# Altium PCB pcb.PcbDoc
Units mil, origin at the board's own origin, x right, y up, seen from the top; angles counter-clockwise.
Board outline 2225 x 1875 mil, 2 copper layers (Top Layer, Bottom Layer), stack 60.4 mil thick; 8 components, 10 nets, 39 pads, 4 vias.
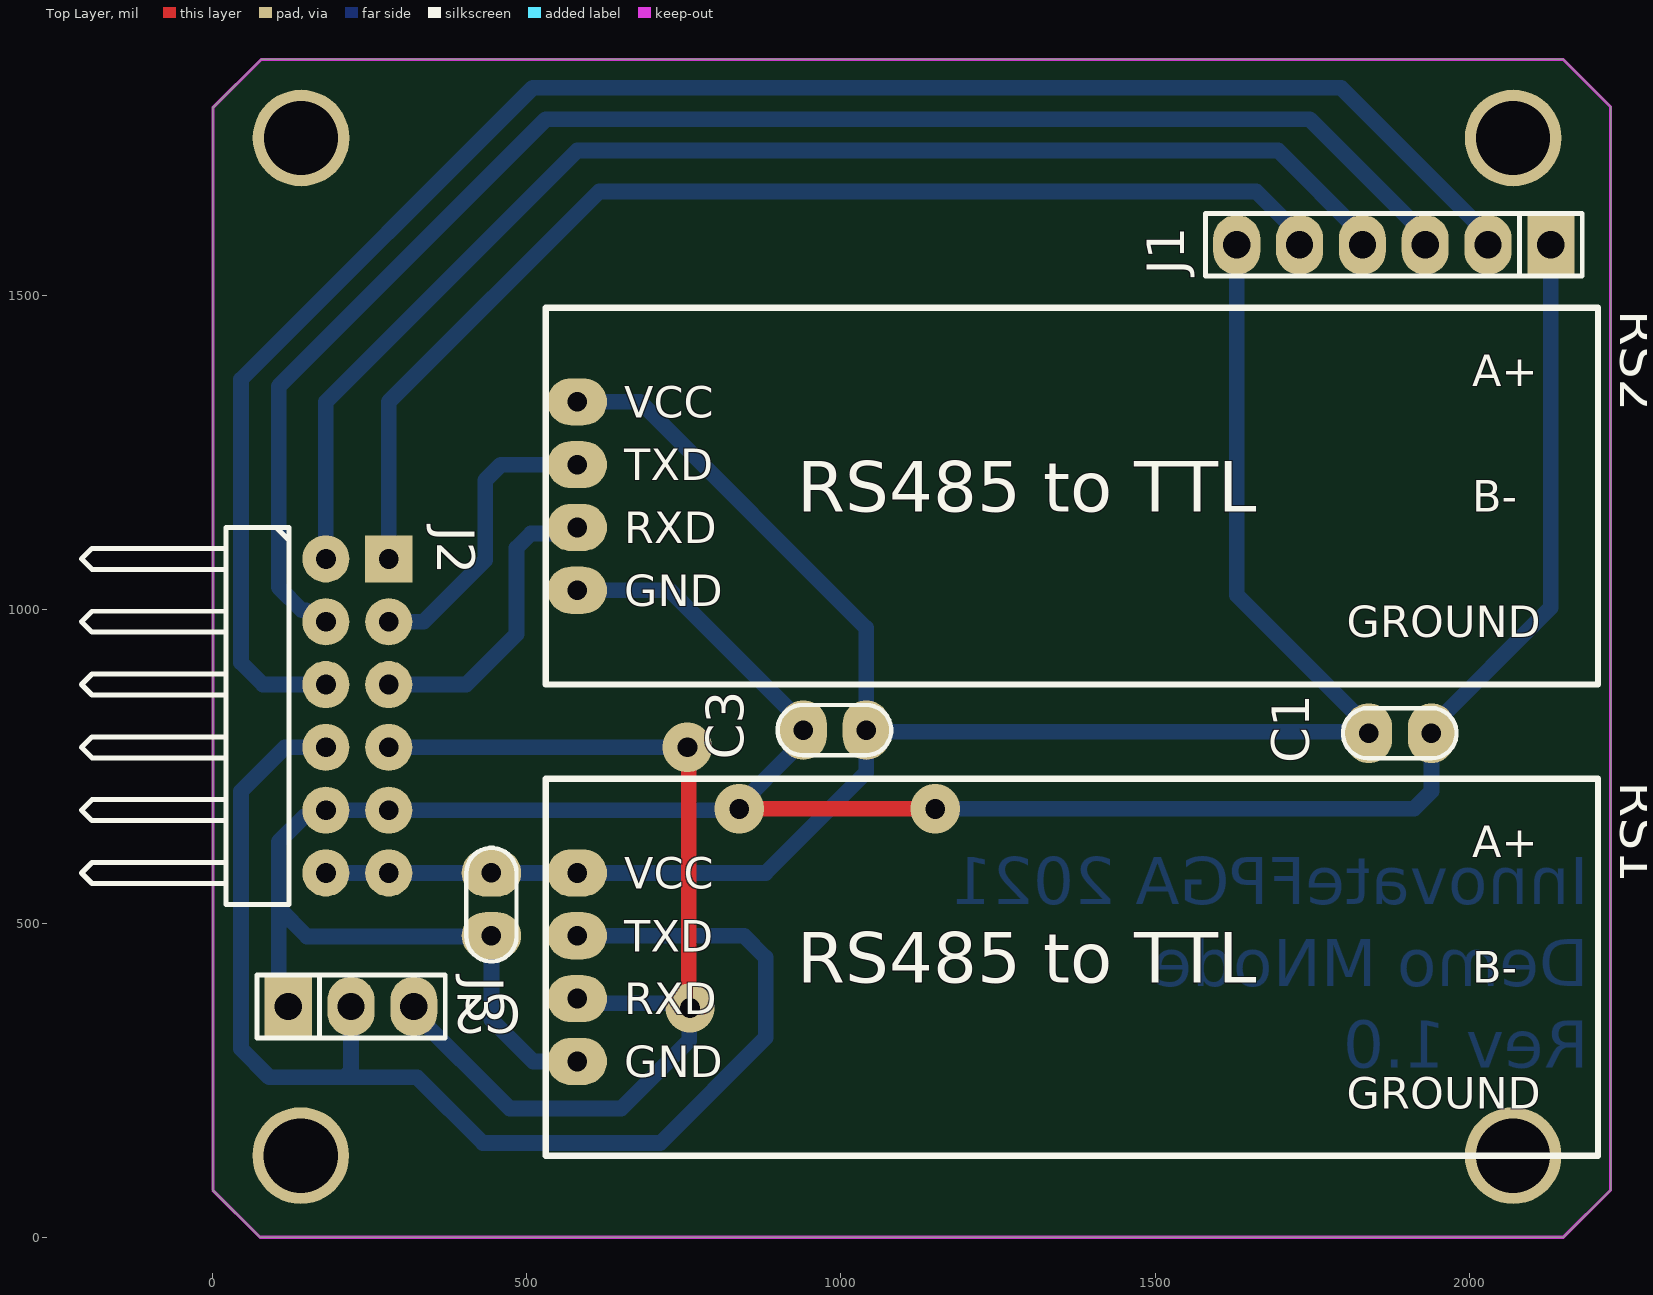
[diagram p0: Top Layer view]
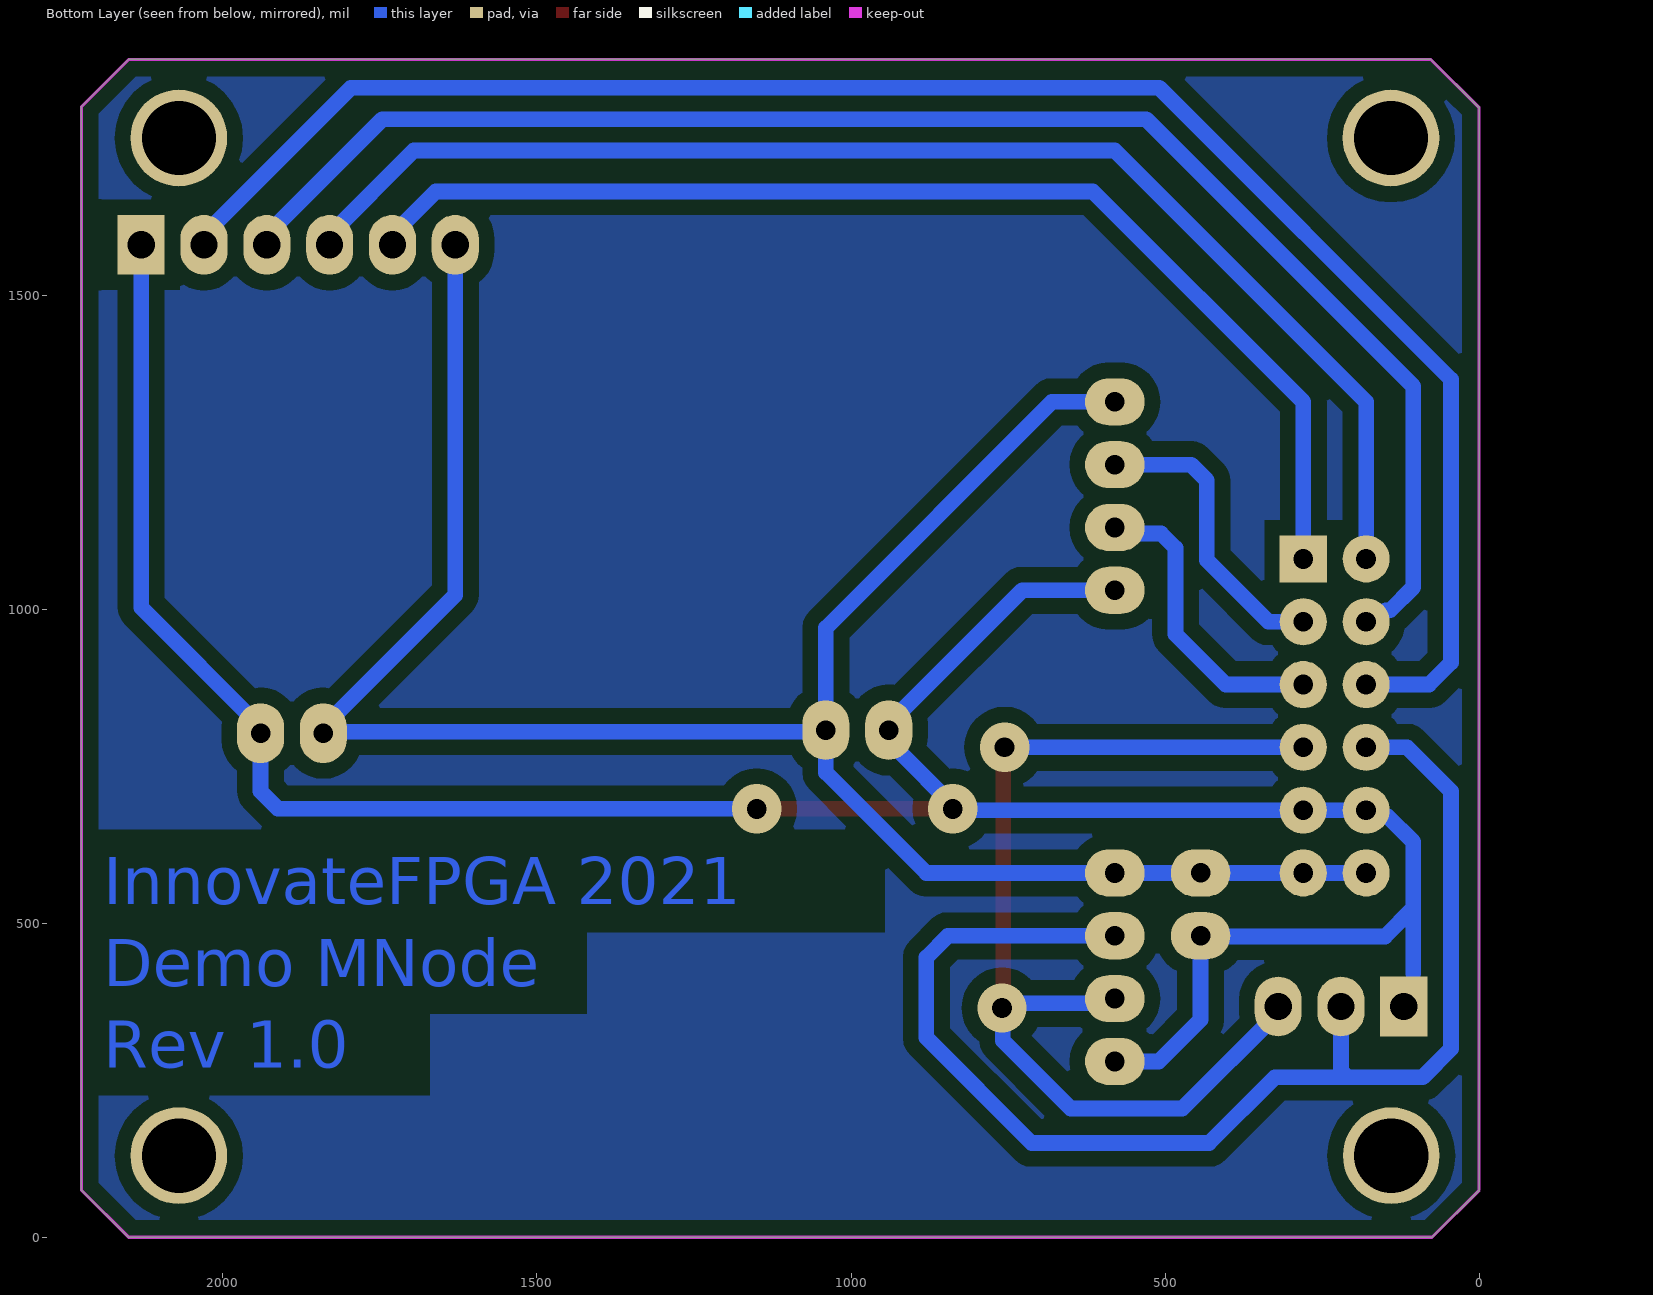
[diagram p1: Bottom Layer view, seen from below]
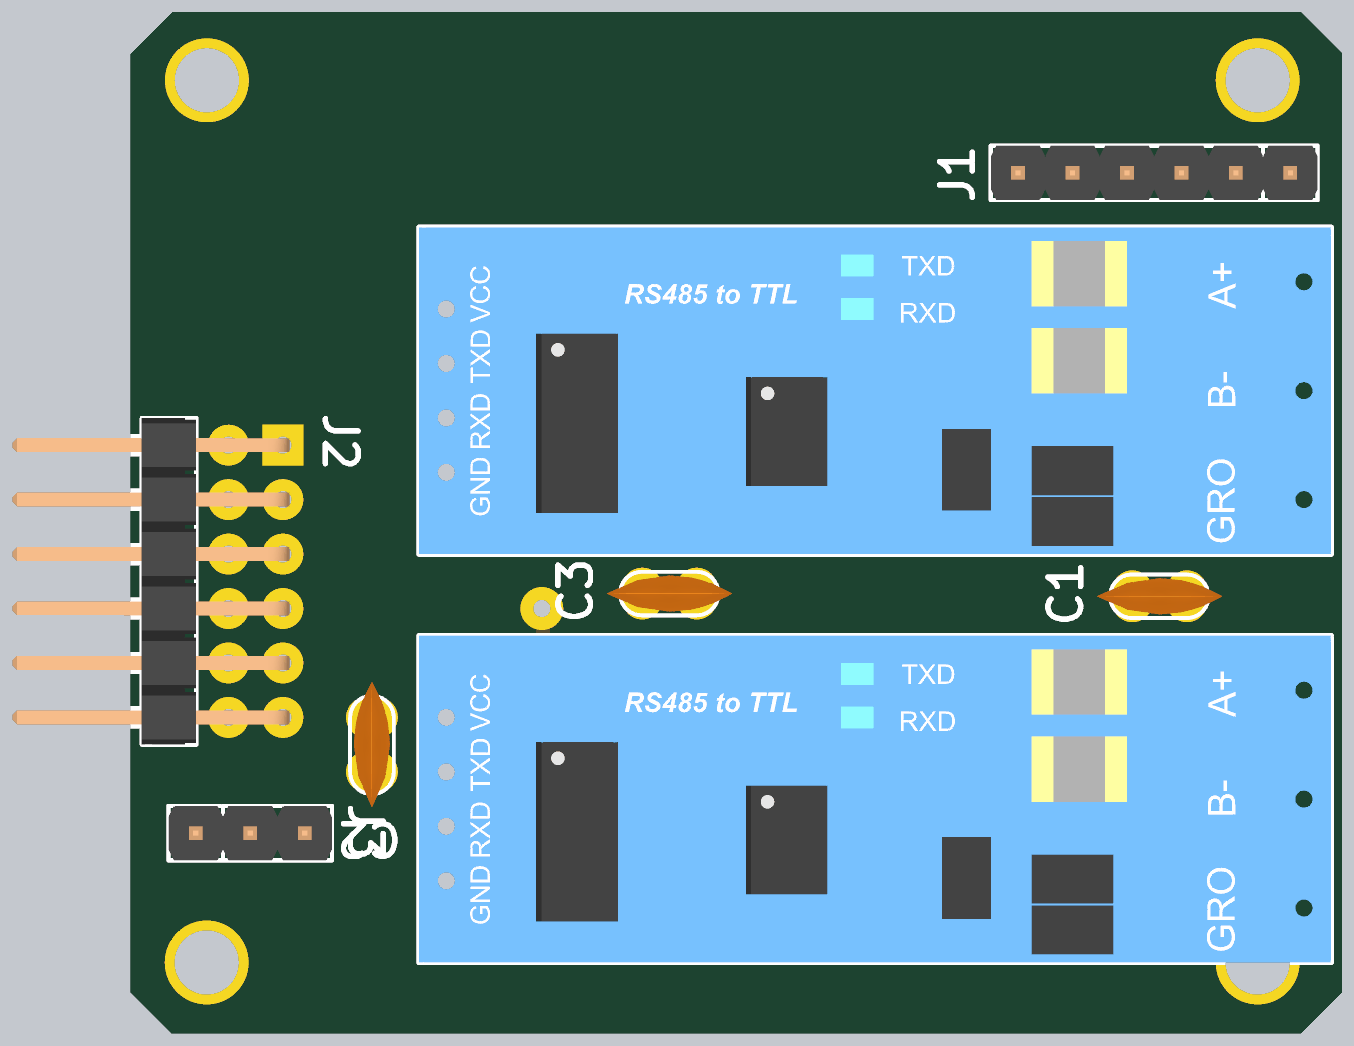
[diagram p2: 3D render of the assembled board from above, using the file's embedded part models]

## Layer stack, top to bottom
Top Solder: solder mask 0.5, Solder Resist, Dk 3.3
Top Layer: signal copper 0.7
Dielectric1: core 59, FR-4, Dk 4.3
Bottom Layer: signal copper 0.7
Bottom Solder: solder mask 0.5, Solder Resist, Dk 3.3

## Board outline
0,75.07 75.07,0 2150,0 2225,75 2225,1800 2150,1875 76.85,1875 0,1798.15

## Design rules (kind name [scope] priority, off if disabled: settings)
Clearance Clearance_2 [InNamedPolygon('NONET_L02_P000')] p1: gap=25 ignorepadtopadclearanceinfootprint=FALSE
Clearance Clearance_1 [InNamedPolygon('NONET_L01_P000')] p2: gap=25 ignorepadtopadclearanceinfootprint=FALSE
Clearance [All] p3: gap=0 ignorepadtopadclearanceinfootprint=FALSE
DiffPairsRouting [All] p1: maxlimit=10 minlimit=10 mostfreqgap=10 toplayer_minwidth=10 toplayer_maxwidth=10 toplayer_prefwidth=10 bottomlayer_minwidth=10 bottomlayer_maxwidth=10 bottomlayer_prefwidth=10 maxuncoupledlength=500
HoleSize [All] p1: absolutevalues=TRUE maxlimit=300 minlimit=10 maxpercent=80.000 minpercent=20.000
MinimumAnnularRing [All] p1: minimumring=10
MinimumSolderMaskSliver [All] p1: minsoldermaskwidth=0
PasteMaskExpansion [All] p1: expansion=10
PlaneClearance [All] p1: clearance=0
PlaneConnect [All] p1: pad.planeconnectstyle=Relief pad.reliefexpansion=20 pad.reliefentries=4 pad.reliefconductorwidth=10 pad.reliefairgap=10 via.planeconnectstyle=Direct via.reliefexpansion=20 via.reliefentries=4 via.reliefconductorwidth=10 via.reliefairgap=10
PolygonConnect [All] p1: thpad.connectstyle=Relief thpad.reliefconductorwidth=10 thpad.reliefentries=4 thpad.polygonreliefangle="90 Angle" thpad.airgapwidth=10 smdpad.connectstyle=Relief smdpad.reliefconductorwidth=10 smdpad.reliefentries=4 smdpad.polygonreliefangle="90 Angle" smdpad.airgapwidth=10 via.connectstyle=Direct via.reliefconductorwidth=10 via.reliefentries=4 via.polygonreliefangle="90 Angle" via.airgapwidth=10
RoutingVias [All] p1: holewidth=39.37 width=39.37 viastyle="Through Hole" minholewidth=10 minwidth=20 maxholewidth=100 maxwidth=100
SMDNeckDown [All] p1: percent=100.000
SilkToSilkClearance [All] p1: silktosilkclearance=0
SilkToSolderMaskClearance SilkscreenOverComponentPads [IsPad] p1: minsilkscreentomaskgap=0 clearancetoexposedcopper=TRUE
SolderMaskExpansion [All] p1: expansion=0 istentingtop=FALSE
Width [All] p1: maxlimit=40 minlimit=10 preferedwidth=25
22 further rules are at their usual default settings.

## Components (designator, comment, footprint, x,y, rotation, side; value= is the part's Value field where it differs from the comment)
C1 "104" CAP-CERAMIC-100mil-BPAD 1890,802.48 r180 top
C2 "104" CAP-CERAMIC-100mil-BPAD 443.49,530 r270 top
C3 "104" CAP-CERAMIC-100mil-BPAD 990,807.45 r180 top
J1 "Header 6x1" TER-J6x1-M-2.54mm-BPAD 2130,1580 r180 top
J2 "TMD Header" TER-J6x2-M-2.54mm-V-BPAD 230,830 r270 top
J3 "Header 3x1" TER-J3x1-M-2.54mm-BPAD 120,367.52 r0 top
RS1 "RS485-Module" COMM-RS485-to-TTL-MODULE-SIMPLIFIED-BPAD 580,580 r0 top
RS2 "RS485-Module" COMM-RS485-to-TTL-MODULE-SIMPLIFIED-BPAD 580,1330 r0 top

## Footprints (in the part's own frame and the unit in brackets; to place one, negate y for a bottom-side part, rotate by r counter-clockwise, add the part's x,y. Pads: shape width x height; smd on the part's side, far side on the other; paste and mask are expansions set on the pad)
CAP-CERAMIC-100mil-BPAD [mil] "CN1"
  oval 75x95 hole 31: 1(-50,0) 2(50,0)
  silkscreen extent -90,-40 91,40, body extent -115,-33 115,33, height 265
COMM-RS485-to-TTL-MODULE-SIMPLIFIED-BPAD [mil] "5#RS485 to TTL module"
  oval 95x75 hole 31.5: 1(0,0) 2(0,-100) 3(0,-200) 4(0,-300)
  silkscreen extent -50,-450 1625,150, body extent -50,-450 1625,150, height 195
TER-J3x1-M-2.54mm-BPAD [mil] "3 pins, 1 row, straight, gold plating, JP3-D1T"
  rect 75x95 hole 43.31: 1(0,0)
  oval 75x95 hole 43.31: 2(100,0) 3(200,0)
  silkscreen extent -50,-50 250,50, body extent -50,-50 250,50, height 336
TER-J6x1-M-2.54mm-BPAD [mil] "6 pins, 1 row, straight, gold plating, JP6-D1T"
  rect 75x95 hole 43.31: 1(0,0)
  oval 75x95 hole 43.31: 2(100,0) 3(200,0) 4(300,0) 5(400,0) 6(500,0)
  silkscreen extent -50,-50 550,50, body extent -50,-50 550,50, height 336
TER-J6x2-M-2.54mm-V-BPAD [mm] "12 pins, dual row, right angled, gold plating, JP6-D2C"
  rect 1.905x1.905 hole 0.8: 1(-6.35,1.27)
  round 1.905 hole 0.8: 2(-3.81,1.27) 3(-1.27,1.27) 4(1.27,1.27) 5(3.81,1.27) 6(6.35,1.27) 7(-6.35,-1.27) 8(-3.81,-1.27) 9(-1.27,-1.27) 10(1.27,-1.27) 11(3.81,-1.27) 12(6.35,-1.27)
  silkscreen extent -7.62,-11.15 7.62,-2.77, body extent -7.62,-11.33 7.62,1.57, height 5.09

## Part data
C1 C2 C3: library part CAP, "Capacitor"
J2: library part "Header 6x2"
RS1 RS2: library part "COMM RS485-to-TTL-simplified", "https://www.thegioiic.com/products/mach-chuyen-doi-rs485-to-ttl"

## Free pads (board coordinates)
  round 154 hole 118.11: 0(140,130) 0(140.43,1750) 0(2070,130) 0(2070,1750)

## Via types
v1: diameter 78.74, hole 31.5, Top Layer to Bottom Layer, 4 vias

## Nets (pads, with @x,y where several pads share a name; then routed paths per layer and width w, separated by ;. In a path a pad name is that pad's centre, name@x,y a point inside that pad or via, vN(x,y) a via of type N, cw(c..) or ccw(c..) an arc to the next point about the centre after c; other vN are vias at no path point)
+3.3: C1.2 C2.1 C3.1 J1.6 J2.6 J2.12 RS1.1 RS2.1 | length 3431.9
  Bottom Layer w25: J2.12 J2.6 C2.1 RS1.1 880,580 1040,740 C3.1 ; RS2.1 680,1330 1040,970 C3.1 ; J1.6 1630,1022.48 1840,812.48 C1.2 1837.52,804.97 1042.48,804.97 C3.1
GND: C1.1 C2.2 C3.2 J1.1 J2.5 J2.11 J3.1 RS1.4 RS2.4 | length 4274.3
  Top Layer w25: v1(837.94,682.06) v1(1150,682.06)
  Bottom Layer w25: 105,419.37 105,524 ; RS1.4 510,280 443.49,346.51 C2.2 442.49,479 150,479 105,524 ; RS2.4 727.45,1030 940,817.45 C3.2 ; C3.2@930.9,780.9 830,680 J2.5 J2.11 170.43,670.43 145.87,670.43 105,629.57 105,524 ; v1(1150,682.06) 1912.06,682.06 1940,710 C1.1 1940,812.48 2130,1002.48 J1.1
TMD_D0: J1.5 J2.1 | length 1883.4
  Bottom Layer w25: J2.1 280,1330 615,1665 1661.07,1665 1730,1596.07 J1.5
TMD_D1: J2.2 RS2.2 | length 477.9
  Bottom Layer w25: J2.2 335.36,980 433.49,1078.14 433.49,1205 458.49,1230 RS2.2
TMD_D2: J2.3 RS2.3 | length 484.1
  Bottom Layer w25: J2.3 403.49,880 483.49,960 483.49,1097.5 506.42,1120.43 570.43,1120.43 RS2.3
TMD_D3: J2.4 J3.3 RS1.3 | length 1686.6
  Top Layer w25: v1(755.51,780) 757.57,777.94 757.57,367.09 v1(759.63,365.03)
  Bottom Layer w25: J2.4 v1(755.51,780) ; J3.3 320,357.52 472.52,205 650,205 758.35,313.35 758.35,363.75 v1(759.63,365.03) 752.15,372.52 587.48,372.52 RS1.3
TMD_D4: J1.4 J2.7 | length 2137.2
  Bottom Layer w25: J2.7 180,1330 580,1730 1696.07,1730 1830,1596.07 J1.4
TMD_D5: J1.3 J2.8 | length 2511.1
  Bottom Layer w25: J2.8 166.47,980 148.44,998.03 141.97,998.03 105,1035 105,1355 530,1780 1746.07,1780 1930,1596.07 J1.3
TMD_D6: J1.2 J2.9 | length 2890.5
  Bottom Layer w25: J2.9 80,880 45,915 45,1365.71 509.29,1830 1796.07,1830 2030,1596.07 J1.2
TMD_D7: J2.10 J3.2 RS1.2 | length 2099.6
  Bottom Layer w25: J2.10 115,780 45,710 45,300 90,255 209.63,255 ; J3.2 220,265.37 209.63,255 ; RS1.2 845.5,480 880,445.5 880,317.52 712.48,150 430,150 325,255 220,255 209.63,255

## Polygon pours and split planes (outlines as drawn)
no net on Bottom Layer "NONET_L02_P000" (solid, pour order 0): 0,75.07 75.07,0 2150,0 2225,75 2225,1800 2150,1875 76.85,1875 0,1798.15

## Keep-outs
Keep-Out Layer:
  lines w5: 0,75.07 75.07,0 2150,0 2225,75 2225,1800 2150,1875 600,1875 76.85,1875 0,1798.15 0,75.07

## Other copper
Bottom Layer:
  text "InnovateFPGA 2021" at 2190,530 h75
  text "Demo MNode" at 2190,400 h75
  text "Rev 1.0" at 2190,270 h75

## Text inside footprints (layer, text, board x,y; h text height)
RS1: Top Overlay "VCC" at 655,555 h50; Top Overlay "TXD" at 655,455 h50; Top Overlay "RXD" at 655,355 h50; Top Overlay "GND" at 655,255 h50; Top Overlay "A+" at 2005,605 h50; Top Overlay "B-" at 2005,405 h50; Top Overlay "GROUND" at 1805,205 h50; Top Overlay "RS485 to TTL" at 930,405 h80
RS2: Top Overlay "VCC" at 655,1305 h50; Top Overlay "TXD" at 655,1205 h50; Top Overlay "RXD" at 655,1105 h50; Top Overlay "GND" at 655,1005 h50; Top Overlay "A+" at 2005,1355 h50; Top Overlay "B-" at 2005,1155 h50; Top Overlay "GROUND" at 1805,955 h50; Top Overlay "RS485 to TTL" at 930,1155 h80